# Altium PCB Adapter_DIP_AVR.PcbDoc
Units mm, origin at the board's own origin, x right, y up, seen from the top; angles counter-clockwise.
Board outline 50 x 50 mm, 2 copper layers (Top Layer, Bottom Layer); 30 components, 11 nets, 118 pads, 0 vias.
Unrouted connection lines stored in the file: 18.
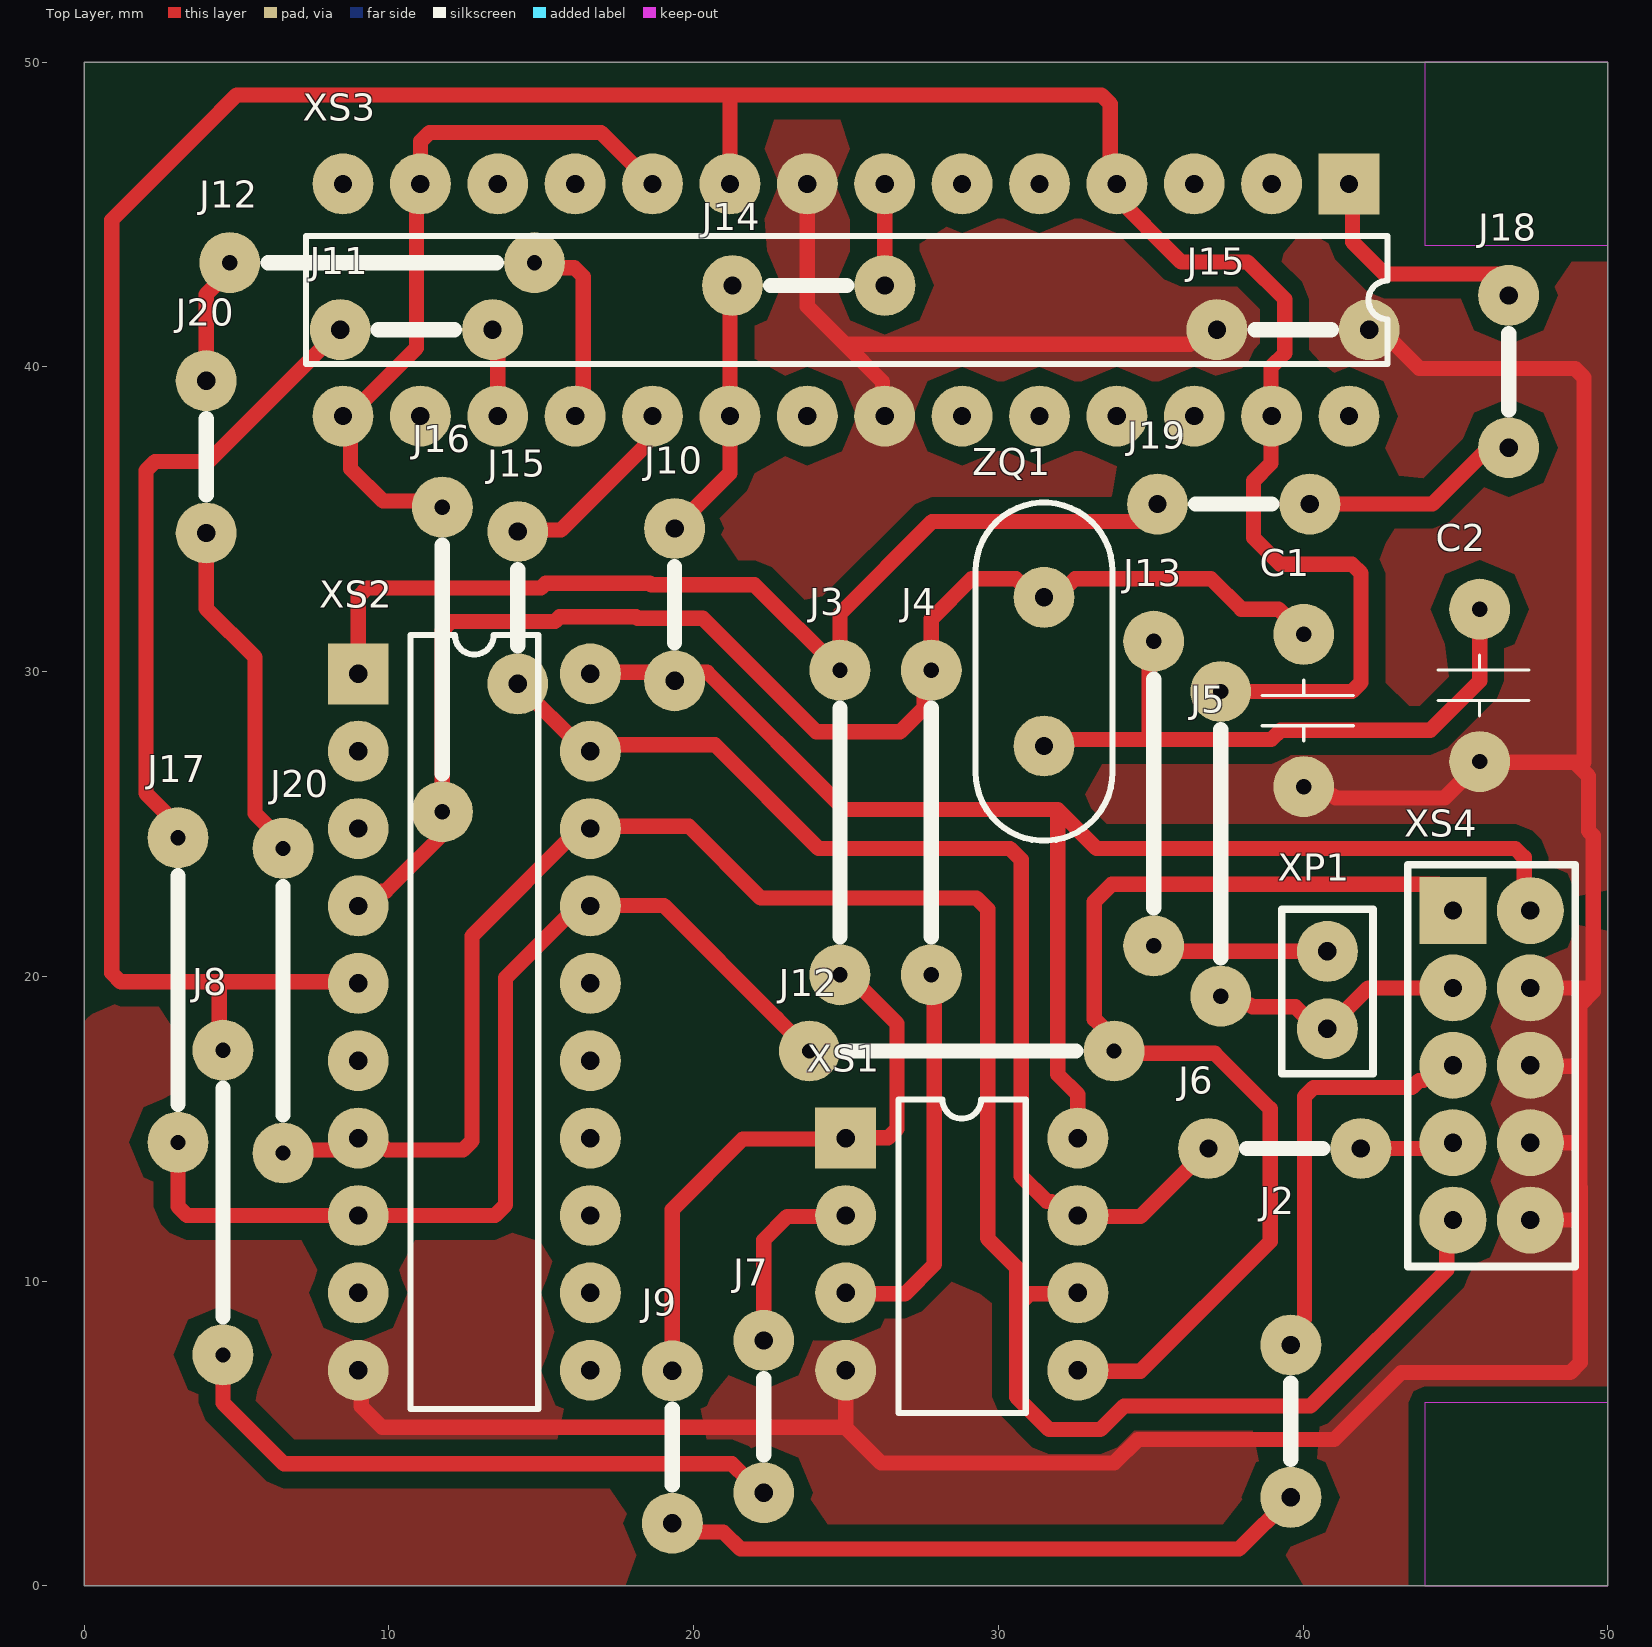
[diagram p0: Top Layer view]
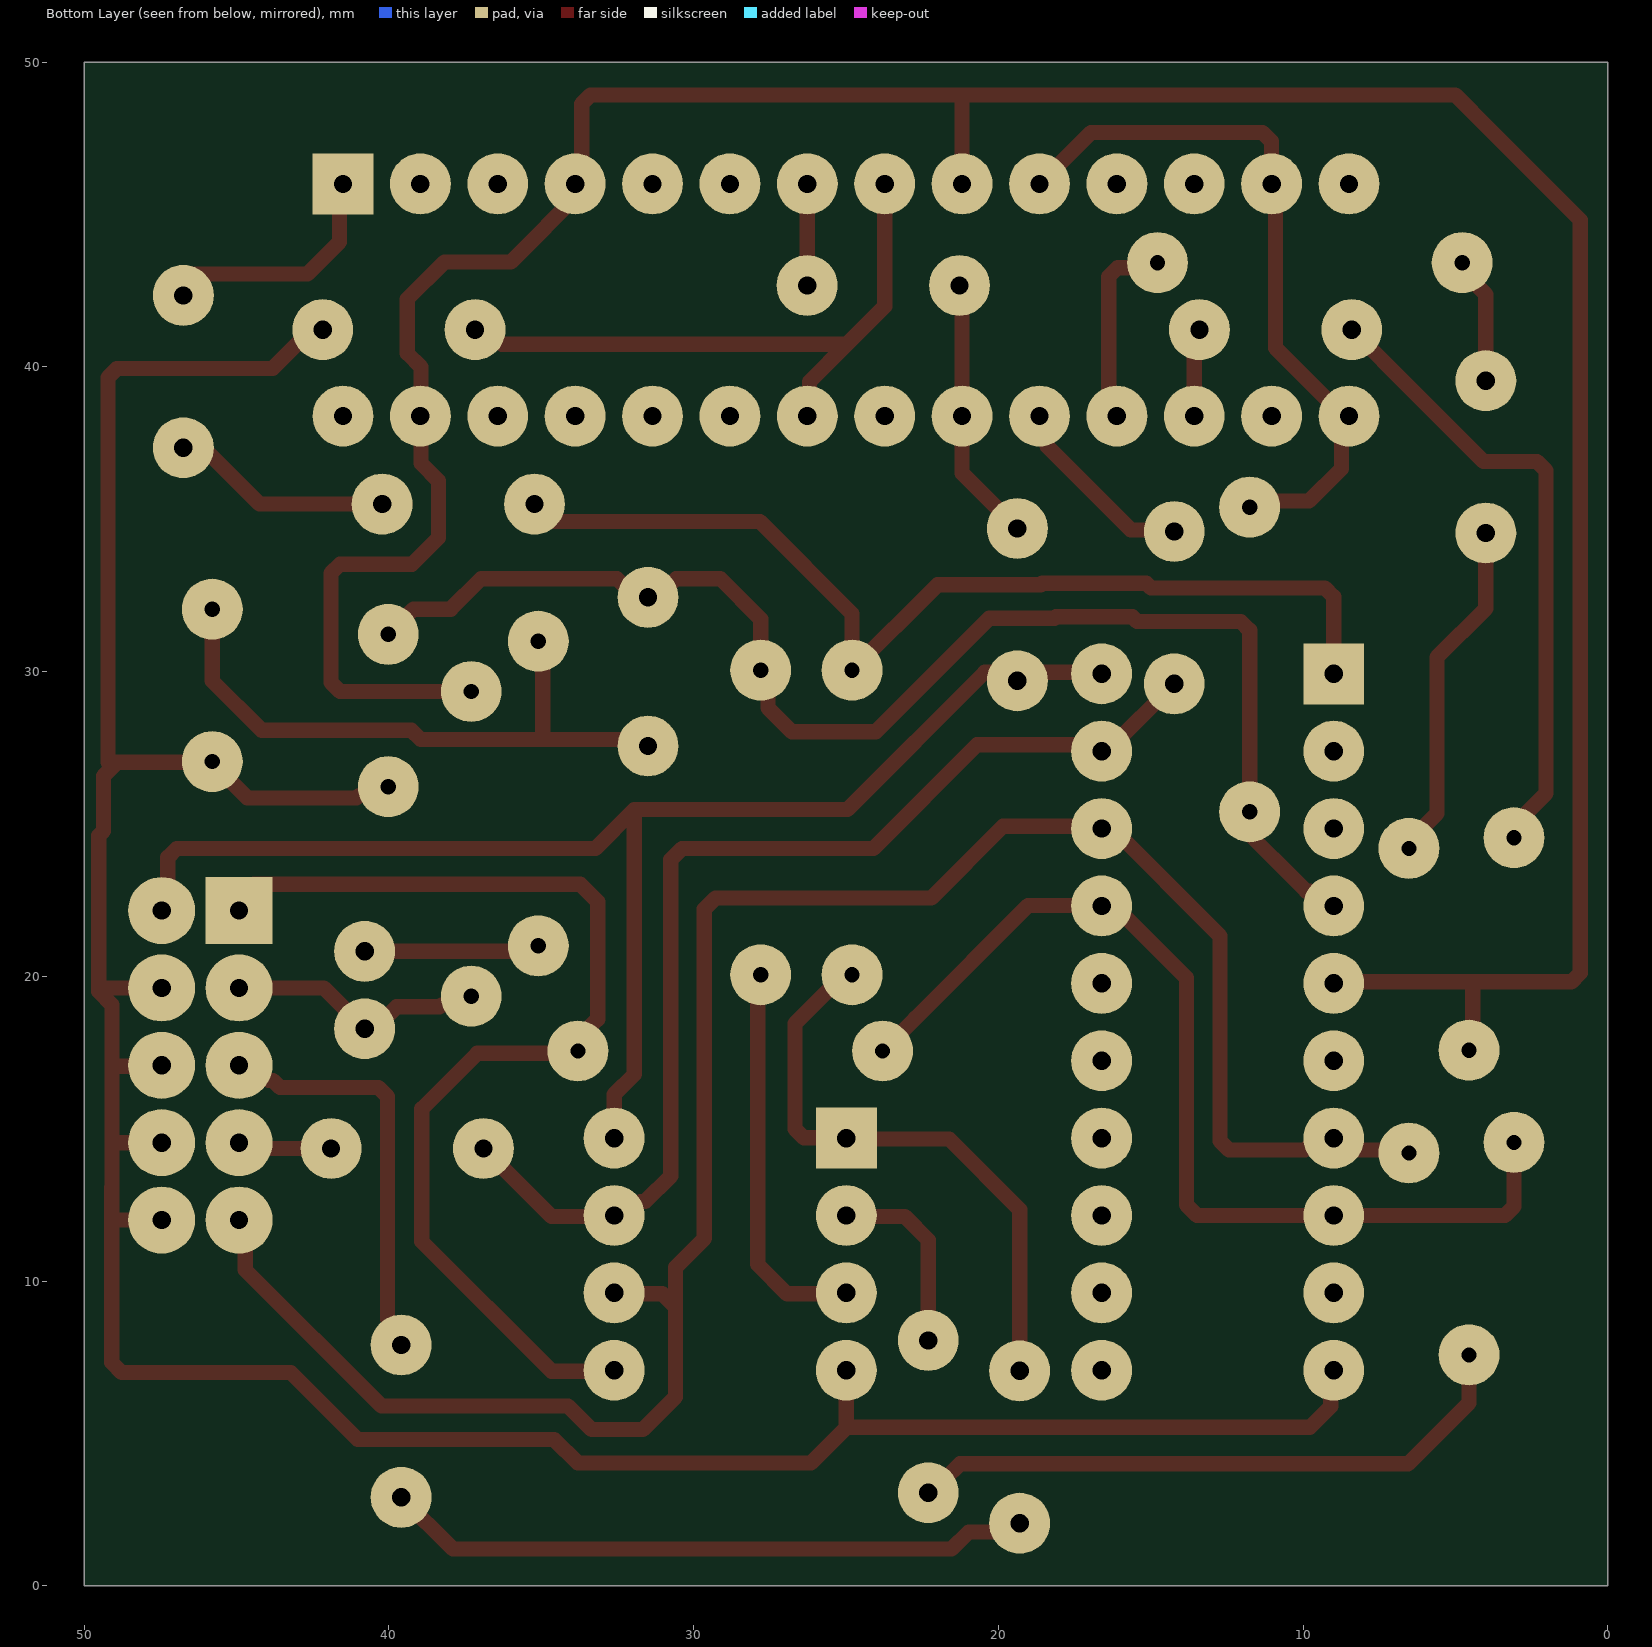
[diagram p1: Bottom Layer view, seen from below]

## Layer stack, top to bottom
Top Solder: solder mask 0.0102, Solder Resist, Dk 3.5
Top Layer: signal copper 0.0356
Dielectric1: dielectric 0.32, FR-4, Dk 4.8
Bottom Layer: signal copper 0.0356
Bottom Solder: solder mask 0.0102, Solder Resist, Dk 3.5

## Board outline
0,0 0,50 50,50 50,0

## Design rules (kind name [scope] priority, off if disabled: settings)
Clearance "Зазоры между КП" [All vs InNet('NC') or InNet('NC1') or InNet('NC2')] p1: gap=0 ignorepadtopadclearanceinfootprint=TRUE except(0.5: Arc-Poly Track-Poly SMDPad-Poly THPad-Poly Via-Poly Fill-Poly Poly-Poly)
Clearance "Основные зазоры" [All] p2: gap=0.254 ignorepadtopadclearanceinfootprint=FALSE except(0: Arc-Hole Track-Hole SMDPad-Hole THPad-Hole Via-Hole Fill-Hole Poly-Hole Region-Hole Text-Hole; 0.5: Arc-Poly Track-Poly SMDPad-Poly THPad-Poly Via-Poly Fill-Poly Poly-Poly; 0.6: Track-Track Track-SMDPad Track-THPad)
ComponentClearance "Зазор перемычки J10" [InComponent('J10')or InComponent('J15') or InComponent('J11')or InComponent('J12')or InComponent('J13')or InComponent('J5')or  InComponent('J8')or InComponent('J17')or InComponent('J20')] p1: gap=0 collisioncheckmode=3 verticalgap=0 showdistances=FALSE
ComponentClearance [All] p2: gap=0.254 collisioncheckmode=3 verticalgap=0.254 showdistances=FALSE
FabricationTestPointUsage TestPointUsage [All] p1: valid=0 allowmultiple=FALSE
FabricationTestpoint Testpoint [All] p1: side=3 testpointundercomponent=TRUE minsize=1.016 maxsize=2.54 preferedsize=1.524 minholesize=0 maxholesize=1.016 preferedholesize=0.813 testpointgrid=0.025 allowsidetop=TRUE allowsidebottom=TRUE usegrid=TRUE gridtolerance=0
PolygonConnect [All] p1: connectstyle=Relief reliefconductorwidth=0.254 reliefentries=4 polygonreliefangle="90 Angle" airgapwidth=0.254
RoomDefinition Adapter_DIP_AVR [InComponentClass('Adapter_DIP_AVR')] p1: confinementstyle=ConfineIn formatcopy=TRUE lockcomponents=FALSE outline 0,0 50,0 50,50 0,50
RoutingVias [All] p1: holewidth=0.711 width=1.27 viastyle="Through Hole" minholewidth=0.711 minwidth=1.27 maxholewidth=0.711 maxwidth=1.27
ShortCircuit "Пересечение с NC площадками" [All vs InNet('NC') or InNet('NC2')] p1: allowed=TRUE
ShortCircuit [All] p2: allowed=FALSE
SilkToSolderMaskClearance SilkscreenOverComponentPads [IsPad] p1: minsilkscreentomaskgap=0.254 clearancetoexposedcopper=TRUE
SolderMaskExpansion [All] p1: expansion=0.102 istentingtop=FALSE
UnRoutedNet [All] p1: checkbadconnections=TRUE
Width [All] p1: maxlimit=1 minlimit=0.5 preferedwidth=0.7
24 further rules are at their usual default settings.

## Classes and differential pairs
component class Adapter_DIP_AVR: C1 C2 J2 J3 J4 J5 J6 J7 J8 J9 J10 XP1 XS1 XS2 XS3 XS4 ZQ1

## Components (designator, comment, footprint, x,y, rotation, side; value= is the part's Value field where it differs from the comment)
C1 "CAP" CAPASITORS 40.025,28.725 r90 top
C2 "CAP" CAPASITORS 45.8,29.55 r90 top
J2 "Jumper" Jumper_5mm 39.6,5.4 r90 top
J3 "Jumper" Jumper_10mm 24.8,25.05 r90 top
J4 "Jumper" Jumper_10mm 27.8,25.05 r90 top
J5 "Jumper" Jumper_10mm 37.3,24.35 r270 top
J6 "Jumper" Jumper_5mm 39.4,14.35 r180 top
J7 "Jumper" Jumper_5mm 22.3,5.55 r90 top
J8 "Jumper" Jumper_10mm 4.55,12.575 r90 top
J9 "Jumper" Jumper_5mm 19.3,4.55 r90 top
J10 "Jumper" Jumper_5mm 19.375,32.2 r270 top
J11 "Jumper" Jumper_5mm 10.9,41.225 r180 top
J12 "Comment" Jumper_10mm 9.775,43.425 r0 top
J12 "Jumper" Jumper_10mm 28.8,17.55 r180 top
J13 "Comment" Jumper_10mm 35.1,26 r90 top
J14 "Comment" Jumper_5mm 23.775,42.675 r0 top
J15 "Comment" Jumper_5mm 39.675,41.225 r0 top
J15 "Comment" Jumper_5mm 14.225,32.1 r90 top
J16 "Comment" Jumper_10mm 11.75,30.4 r90 top
J17 "Comment" Jumper_10mm 3.075,19.55 r90 top
J18 "Comment" Jumper_5mm 46.75,39.85 r270 top
J19 "Comment" Jumper_5mm 37.725,35.5 r0 top
J20 "Comment" Jumper_5mm 4,37.05 r90 top
J20 "Comment" Jumper_10mm 6.525,19.2 r90 top
XP1 "PLS-2" PLS-2 40.8,19.55 r270 top
XS1 "Socket_DIP8" Socket_DIP8 28.8,10.88 r0 top
XS2 "Socket_DIP20" Socket_DIP20 12.8,18.5 r0 top
XS3 "Socket_DIP28" Socket_DIP28 25,42.2 r270 top
XS4 "PBD-10" PBD-10 46.19,17.08 r0 top
ZQ1 "4MHz" HC-49S 31.5,30 r270 top

## Footprints (in the part's own frame and the unit in brackets; to place one, negate y for a bottom-side part, rotate by r counter-clockwise, add the part's x,y. Pads: shape width x height; smd on the part's side, far side on the other; paste and mask are expansions set on the pad)
CAPASITORS [mm]
  round 2 hole 0.5: 1(-2.5,0) 2(2.5,0)
  silkscreen extent -1,-1.63 1,1.38, body extent -2.8,-1.21 2.78,1, height 7
HC-49S [mm]
  round 2 hole 0.6: 1(-2.44,0) 2(2.44,0)
  silkscreen extent -5.55,-2.25 5.55,2.25, body extent -5.49,-2.25 5.49,2.25, height 3.6
Jumper_5mm [mm]
  round 2 hole 0.6 mask+0: 1(-2.5,0) 1(2.5,0)
  silkscreen extent -1.25,0 1.25,0
Jumper_10mm [mm]
  round 2 hole 0.5 mask+0: 1(-5,0) 1(5,0)
  silkscreen extent -3.75,0 3.75,0
PBD-10 [mm]
  rect 2.2x2.2 hole 0.6: 1(-1.27,5.08)
  round 2.2 hole 0.6: 2(1.27,5.08) 3(-1.27,2.54) 4(1.27,2.54) 5(-1.27,0) 6(1.27,0) 7(-1.27,-2.54) 8(1.27,-2.54) 9(-1.27,-5.08) 10(1.27,-5.08)
  silkscreen extent -2.75,-6.61 2.75,6.58, body extent -2.54,-6.35 2.54,6.35, height 8.4
PLS-2 [mm]
  round 2 hole 0.6: 1(-1.27,0) 2(1.27,0)
  silkscreen extent -2.65,-1.5 2.75,1.5, body extent -2.54,-1.25 2.54,1.29, height 8.64
Socket_DIP8 [mm]
  rect 2x2 hole 0.6: 1(-3.81,3.81)
  round 2 hole 0.6: 2(-3.81,1.27) 3(-3.81,-1.27) 4(-3.81,-3.81) 5(3.81,-3.81) 6(3.81,-1.27) 7(3.81,1.27) 8(3.81,3.81)
  silkscreen extent -2.08,-5.21 2.1,5.08, body extent -5.08,-5.08 5.08,5.08, height 5.2
Socket_DIP20 [mm]
  rect 2x2 hole 0.6: 1(-3.81,11.43)
  round 2 hole 0.6: 2(-3.81,8.89) 3(-3.81,6.35) 4(-3.81,3.81) 5(-3.81,1.27) 6(-3.81,-1.27) 7(-3.81,-3.81) 8(-3.81,-6.35) 9(-3.81,-8.89) 10(-3.81,-11.43) 11(3.81,-11.43) 12(3.81,-8.89) 13(3.81,-6.35) 14(3.81,-3.81) 15(3.81,-1.27) 16(3.81,1.27) 17(3.81,3.81) 18(3.81,6.35) 19(3.81,8.89) 20(3.81,11.43)
  silkscreen extent -2.1,-12.7 2.1,12.7, body extent -5.08,-12.7 5.08,12.7, height 5.2
Socket_DIP28 [mm]
  rect 2x2 hole 0.6: 1(-3.81,16.51)
  round 2 hole 0.6: 2(-3.81,13.97) 3(-3.81,11.43) 4(-3.81,8.89) 5(-3.81,6.35) 6(-3.81,3.81) 7(-3.81,1.27) 8(-3.81,-1.27) 9(-3.81,-3.81) 10(-3.81,-6.35) 11(-3.81,-8.89) 12(-3.81,-11.43) 13(-3.81,-13.97) 14(-3.81,-16.51) 15(3.81,-16.51) 16(3.81,-13.97) 17(3.81,-11.43) 18(3.81,-8.89) 19(3.81,-6.35) 20(3.81,-3.81) 21(3.81,-1.27) 22(3.81,1.27) 23(3.81,3.81) 24(3.81,6.35) 25(3.81,8.89) 26(3.81,11.43) 27(3.81,13.97) 28(3.81,16.51)
  silkscreen extent -2.1,-17.72 2.1,17.78, body extent -5.08,-17.78 5.08,17.78, height 5.2

## Part data
ZQ1: library part Crystal

## Nets (pads, with @x,y where several pads share a name; then routed paths per layer and width w, separated by ;. In a path a pad name is that pad's centre, name@x,y a point inside that pad or via, vN(x,y) a via of type N, cw(c..) or ccw(c..) an arc to the next point about the centre after c; other vN are vias at no path point)
GND: C1.1 C2.1 J15.1@37.175,41.225 J15.1@42.175,41.225 XS1.4 XS2.10 XS3.8 XS3.22 XS4.4 XS4.6 XS4.8 XS4.10 | length 124.9
  Top Layer w0.5: XS2.10@8.99,7.12 9.089,7.021 9.089,5.886 9.775,5.2 24.975,5.2 24.99,5.185 ; XS3.8 23.73,41.986 24.966,40.75 ; XS1.4@24.99,7.04 24.99,5.185 ; XS3.22 26.2,38.46 26.2,39.516 24.966,40.75 ; J15.1@37.175,41.225 36.769,41.225 36.294,40.75 24.966,40.75 ; C1.1@40.038,26.287 40.387,25.938 40.98,25.938 41.068,25.85 44.65,25.85 45.825,27.025 48.925,27.025 ; J15.1@42.175,41.225 42.543,41.225 43.818,39.95 48.932,39.95 49.225,39.657 49.225,27.025 48.925,27.025 ; XS4.10@46.87,12 49.1,12 ; XS4.8@46.87,14.54 49.09,14.54 ; XS4.6@47.46,17.05 49.09,17.05 ; XS4.4 49.405,19.62 49.525,19.5 ; 24.99,5.185 26.15,4.025 33.803,4.025 34.578,4.8 41.025,4.8 43.225,7 48.775,7 49.1,7.325 49.1,12 ; 48.925,27.025 49.075,26.875 49.375,26.575 49.375,24.769 49.525,24.619 49.525,19.5 ; 49.09,14.54 49.09,17.05 ; 49.09,14.54 49.09,13.09 49.1,13.08 49.1,12 ; 49.09,17.05 49.09,19.065 49.525,19.5
MISO: J12.1@4.775,43.425 J12.1@14.775,43.425 J20.1 XS1.6 XS2.18 XS3.18 XS4.9 | length 91.8
  Top Layer w0.5: J20.1@4,34.55 4,32.075 5.6,30.475 5.6,25.343 6.525,24.418 J20.1@6.525,24.2 ; J20.1@4,39.55 4,42.382 4.775,43.157 J12.1@4.775,43.425 ; J20.1@6.7,14.3 8.248,14.3 8.389,14.441 8.849,14.441 8.99,14.3 9.131,14.441 9.792,14.441 9.933,14.3 12.432,14.3 12.725,14.593 12.725,21.325 16.325,24.925 19.85,24.925 22.2,22.575 29.282,22.575 29.65,22.207 29.65,11.4 30.6,10.45 30.6,9.15 ; J12.1@14.775,43.4 14.918,43.257 16.082,43.257 16.375,42.964 16.375,38.655 XS3.18 ; XS1.6@32.61,9.58 31.03,9.58 30.6,9.15 ; XS4.9 44.72,11.8 44.72,10.37 40.25,5.9 34.122,5.9 33.347,5.125 31.668,5.125 30.6,6.193 30.6,9.15
MOSI: J11.1 J12.1@23.8,17.55 J12.1@33.8,17.55 J17.1 XS1.5 XS2.17 XS3.17 XS4.1 | length 92.9
  Top Layer w0.5: J17.1@3.075,14.55 3.075,12.443 3.368,12.15 13.475,12.15 13.825,12.5 13.825,19.95 15.756,21.881 15.779,21.881 16.258,22.36 16.61,22.36 16.645,22.325 19.025,22.325 22.725,18.625 J12.1@23.8,17.55 ; J17.1@3.075,24.55 3.075,24.956 2.025,26.006 2.025,36.607 2.318,36.9 4.075,36.9 6.4,39.225 J11.1@8.4,41.225 ; XS3.17 J11.1@13.57,41.117 ; XS1.5@32.61,7.04 34.665,7.04 38.925,11.3 38.925,15.65 37.102,17.473 J12.1@33.877,17.473 ; J12.1@33.8,17.55 33.8,17.943 33.15,18.593 33.15,22.45 33.725,23.025 44.427,23.025 44.72,22.732 XS4.1@44.72,22.16
NC: XS3.2 XS3.3 XS3.4 XS3.5 XS3.6 XS3.11 XS3.12 XS3.13 XS3.14
NC1: XS3.15 XS3.16 XS3.24 XS3.25 XS3.26 XS3.27 XS3.28
NC2: XS2.6 XS2.7 XS2.8 XS2.9
Reset: J2.1 J3.1 J9.1 J18.1 J19.1 XS1.1 XS2.1 XS3.1 XS4.5 | length 104.4
  Top Layer w0.5: XS2.1@8.99,29.98 8.99,32.457 9.283,32.75 14.991,32.75 15.141,32.9 18.559,32.9 18.609,32.85 22,32.85 24.8,30.05 24.8,31.9 27.825,34.925 34.65,34.925 J19.1@35.225,35.5 ; J9.1@19.3,2.05 19.587,1.763 20.971,1.763 21.534,1.2 37.9,1.2 39.6,2.9 J2.1@39.839,3.139 ; J9.1@19.3,7.05 19.3,12.35 21.61,14.66 24.99,14.66 25.03,14.7 26.382,14.7 26.675,14.993 26.675,18.45 J3.1@24.847,20.278 ; J19.1@39.473,35.5 44.25,35.5 J18.1@46.8,38.05 ; J2.1@39.887,7.953 39.887,8.593 40.05,8.756 40.05,16.057 40.343,16.35 43.349,16.35 43.577,16.35 43.805,16.578 43.958,16.578 44.46,17.08 XS4.5 ; XS3.1@41.51,46.045 41.622,45.933 41.622,44.103 42.675,43.05 J18.1@46.8,43.05
SCK: J6.1 J15.1@14.225,29.6 J15.1@14.225,34.6 XS1.7 XS2.19 XS3.19 XS4.7 | length 46.2
  Top Layer w0.5: J15.1@14.225,29.6 16.385,27.44 XS2.19@16.61,27.44 ; J15.1@14.225,34.6 14.275,34.65 15.65,34.65 18.401,37.401 18.401,38.176 XS3.19@18.65,38.425 ; XS2.19@16.5,27.55 16.55,27.6 20.7,27.6 24.1,24.2 30.382,24.2 30.75,23.832 30.75,13.45 31.593,12.607 31.747,12.607 32.321,12.033 XS1.7@32.345,12.033 ; XS1.7@32.61,12.12 34.67,12.12 J6.1@36.9,14.35 ; J6.1@41.9,14.35 44.424,14.35 XS4.7@44.68,14.094
VCC: J10.1 J14.1 XS1.8 XS2.20 XS3.7 XS3.20 XS4.2 | length 58.1
  Top Layer w0.5: XS2.20@16.61,29.98 20.445,29.98 24.95,25.475 31.95,25.475 ; J10.1@19.375,34.7 21.19,36.515 XS3.20 21.19,42.59 J14.1@21.275,42.675 ; XS3.7 26.275,46.005 J14.1@26.275,42.675 ; XS1.8@32.65,14.7 32.61,14.66 XS1.8 32.61,16.124 31.95,16.784 31.95,25.475 ; XS4.2@47.26,22.225 47.26,23.907 46.967,24.2 33.225,24.2 31.95,25.475
XTAL1: C2.2 J5.1 J7.1 J8.1 J13.1 XP1.1 XP1.2 XS1.2 XS2.5 XS3.9 XS4.3 ZQ1.2 | length 165.4
  Top Layer w0.5: J8.1@4.425,17.428 4.425,19.82 ; J8.1@4.55,7.83 4.55,6 6.55,4 21.257,4 21.764,3.494 J7.1@22.219,3.494 ; XS2.5@8.99,19.82 4.425,19.82 ; XS3.9 21.19,48.915 21.2,48.925 ; J7.1@22.3,8.05 22.3,11.35 23.07,12.12 XS1.2@24.99,12.12 ; ZQ1.2@31.8,28.068 32.093,27.775 34.95,27.775 ; J13.1@35.1,31 34.95,30.85 34.95,27.775 ; J13.1@35.325,21.05 35.555,20.82 XP1.1 ; J5.1@37.3,19.35 37.587,19.063 38.28,19.063 38.343,19 39.757,19 40.477,18.28 XP1.2 42.14,19.62 XS4.3 XS4.3@45.248,19.62 ; J5.1@37.3,29.35 41.607,29.35 41.9,29.643 41.9,33.232 41.607,33.525 39.243,33.525 38.373,34.395 38.373,36.264 38.95,36.841 38.95,38.39 38.95,40 39.4,40.45 39.4,42.225 38.175,43.45 36,43.45 33.675,45.775 33.675,48.632 33.382,48.925 21.19,48.925 5,48.925 3.87,47.795 0.9,44.825 0.9,20.113 1.193,19.82 4.425,19.82 ; C2.2 45.8,29.7 44.175,28.075 39.259,28.075 38.959,27.775 34.95,27.775
XTAL2: C1.2 J4.1 J16.1 XS1.3 XS2.4 XS3.10 ZQ1.1 | length 82.2
  Top Layer w0.5: XS2.4@8.99,22.36 9.342,22.36 9.774,22.792 9.892,22.792 J16.1@12.125,25.025 ; J16.1@11.75,25.4 11.75,31.357 12.043,31.65 15.447,31.65 15.597,31.8 18.103,31.8 18.153,31.75 20.3,31.75 24.025,28.025 26.775,28.025 27.563,28.813 27.563,29.813 27.8,30.05 27.8,31.725 29.125,33.05 30.584,33.05 30.857,32.777 31.277,32.777 31.55,33.05 31.823,32.777 32.243,32.777 32.516,33.05 36.975,33.05 37.975,32.05 39.2,32.05 C1.2 ; J16.1@11.75,35.4 11.55,35.6 9.8,35.6 8.739,36.661 8.739,38.141 8.49,38.39 8.671,38.572 8.886,38.611 10.9,40.625 10.9,46.01 11.033,46.143 11.033,47.407 11.326,47.7 16.96,47.7 XS3.10 ; XS3.10@18.559,46.545 XS3.10@18.65,46.635 ; XS1.3@24.99,9.58 26.93,9.58 27.9,10.55 27.9,19.875 J4.1@27.625,20.15
pads on no net: XS2.2 XS2.3 XS2.11 XS2.12 XS2.13 XS2.14 XS2.15 XS2.16 XS3.21 XS3.23

## Polygon pours and split planes (outlines as drawn)
GND on Top Layer "Bottom Layer-No Net" (solid, remove dead copper, pour order 0): 0,50 50,50 50,0 0,0

## Keep-outs
Top Layer:
  region: 50,44 50,50 44,50 44,44
  rectangle: 44,0 50,6

## Silkscreen, mask and mechanical layers (free items; w line width, h text height)
Mechanical 1:
  the board outline again, w0.2
Mechanical 16:
  drawing of 1882 lines, arcs and shapes, not listed
  text "1" at -174.963,165.511 h1.78
  text "2" at -125.924,165.511 h1.78
  text "3" at -76.665,165.511 h1.78
  text "4" at -27.372,165.511 h1.78
  text "5" at 21.904,165.511 h1.78
  text "6" at 70.926,165.511 h1.78
  text "7" at 120.456,165.511 h1.78
  text "8" at 169.478,165.511 h1.78
  text "A" at -197.095,131.526 h1.78
  text "A" at 191.525,131.526 h1.78
  text "B" at -197.095,60.914 h1.78
  text "B" at 191.525,60.914 h1.78
  text "C" at -197.095,-9.698 h1.78
  text "C" at 191.525,-9.698 h1.78
  text "D" at -197.095,-79.802 h1.78
  text "D" at 191.525,-79.802 h1.78
  text "ENGINEER:" at 76.59,-79.98 h1.14
  text "TITLE:" at 114.69,-79.98 h1.14
  text "PCB DESIGNER:" at 76.59,-87.473 h1.14
  text "DATE:" at 76.59,-95.22 h1.14
  text "PART NO.:" at 114.69,-95.22 h1.14
  text "REV:" at 168.03,-95.22 h1.14
  text "Altium Limited" at 43.57,-97.76 h1.78
  text ".PRINT_DATE" at 77.86,-98.268 h1.78
  text "12a Rodborough Rd" at 43.57,-100.3 h1.78
  text "Frenchs Forest" at 43.57,-102.84 h1.78
  text "FILE NAME:" at 76.59,-102.84 h1.14
  text "DWG NO:" at 114.69,-102.84 h1.14
  text "SCALE:" at 168.03,-102.84 h1.14
  text "NSW 2086" at 43.57,-105.38 h1.78
  text ".PCB_FILE_NAME_NO_PATH" at 77.86,-105.888 h1.78
  text "1" at -174.963,-111.349 h1.78
  text "2" at -125.924,-111.349 h1.78
  text "3" at -76.665,-111.349 h1.78
  text "4" at -27.372,-111.349 h1.78
  text "5" at 21.904,-111.349 h1.78
  text "6" at 70.926,-111.349 h1.78
  text "7" at 120.456,-111.349 h1.78
  text "8" at 169.478,-111.349 h1.78